# Altium PCB MODULIQ_Hub_ESP32-S3.PcbDoc (part 2 of 2)
Units mm, origin at the board's own origin, x right, y up, seen from the top; angles counter-clockwise.
Board outline 24 x 76.5 mm, 4 copper layers (Top, Layer 1, Layer 2, Bot), stack 1.483 mm thick; 56 components, 63 nets, 265 pads, 248 vias.
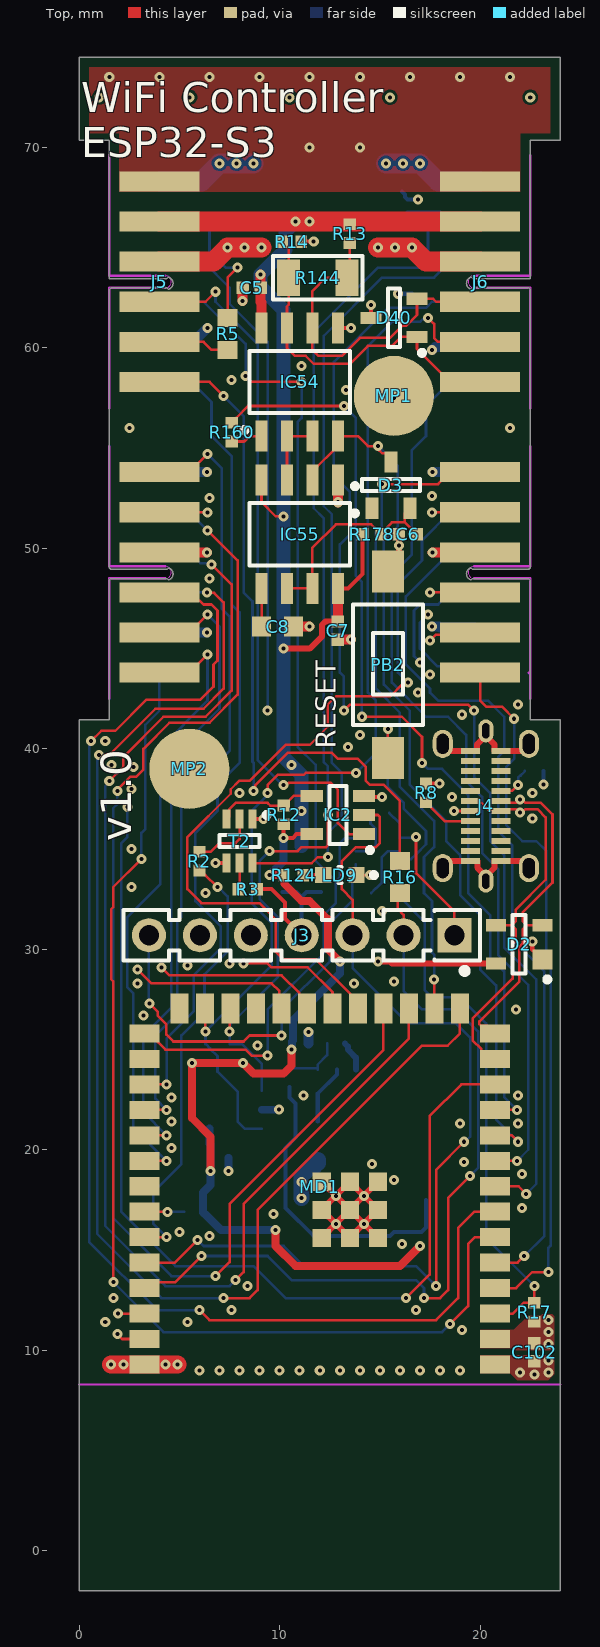
[diagram p0: Top view]

## Via types
v1: diameter 0.5, hole 0.2, Top to Bot, tented both sides, 239 vias
v2: diameter 0.5, hole 0.2, Top to Bot, 9 vias

## Nets (pads, with @x,y where several pads share a name; then routed paths per layer and width w, separated by ;. In a path a pad name is that pad's centre, name@x,y a point inside that pad or via, vN(x,y) a via of type N, cw(c..) or ccw(c..) an arc to the next point about the centre after c; other vN are vias at no path point) (continued)
P3V3: (continued)
  Bot w0.4: IC30.4 6.5,20.3 6.55,20.25 C9.1 v1(6.55,18.95) 6.55,18.25 6.17,17.87 R7.1 6.17,16.88 6.26,16.79 6.28,16.79 7.07,16 v1(9.8,16) ; v1(9.5,33.7) 10.2,34.4 v1(10.2,35.56) ; v1(10.6,25) 10.609,25.009 10.609,25.393 10.677,25.461 10.677,26.477 13,28.8 v1(13,29.4)
  other v1: 23.4,10.3 23.4,10.9 23.4,11.5
P5V0: C2.2 C5.1 C7.1 D1.3 D2.4 IC3.3 IC3.5 IC54.8 IC55.4 IC55.8 J5.2 J6.2 R13.1 R178.1 | length 99.5
  Top w0.127: IC55.4 9.095,52.305 9.8,51.6 v1(10.2,51.6)
  Top w0.2: IC55.8 13.4,48 14.13,48.73 R178.1
  Top w0.3: v1(10.2,45) 11.5,45 12.1,45.6 12.1,46.174 12.276,46.35 C7.1 ; v1(14.9,29.4) 15.5,29.4 15.6,29.3 D2.4
  Top w0.5: v1(9.05,63.65) C5.1 9.05,62.3 9.095,62.255 IC54.8 ; C7.1 12.9,47.995 IC55.8
  Top w1: J5.2 v1(10.8,66.3) v1(11.5,66.3) J6.2
  Layer 2 w0.4: v1(10.6,39.2) 11.1,38.7 v1(11.1,36.9) 11.1,34.905 14.9,31.105 v1(14.9,29.4) 14.9,28.1 11.9,25.1 11.9,19.2 v1(11.1,18.4) v1(11.1,17.6)
  Bot w0.2: IC3.3 11.9,22.8 12.85,23.75 IC3.5
  Bot w0.7: D1.3 v1(11.1,36.9) 11.1,38.7 10.2,39.6 v1(10.2,45) v1(10.2,51.6) 10.2,61.9 9.4,62.7 9.05,63.05 v1(9.05,63.65) 10.3,64.9 10.3,65.8 v1(10.8,66.3) v1(11.5,66.3)
  Bot w0.8: v1(11.1,17.6) v1(11.1,18.4) 11.1,18.7 11.575,19.175 11.725,19.175 11.9,19.35 C2.2
P12V0: J5.1 J5.3 J6.1 J6.3 | length 10.8
  Top w1: J5.3 6.7,64.3 v1(7.4,65) v1(8.25,65) v1(9.1,65) ; v1(14.9,65) v1(15.75,65) v1(16.6,65) 17.3,64.3 J6.3
  other v1: 11.5,70 14,70 1.5,73.5 4,73.5 6.5,73.5 9,73.5 11.5,73.5 14,73.5 16.5,73.5 19,73.5 21.5,73.5
RESETn_O: J6.9 T2.6 | length 39.9
  Top w0.127: T2.6 11.6,34.3 11.9,34.6 v1(12.4,34.6)
  Bot w0.127: v1(12.4,34.6) 12.4,35.8 13.1,36.5 13.1,38.8 12.6,39.3 12.6,51.7 12.2,52.1 12.2,60.6 15.1,63.5 17.7,63.5 18.5,64.3 J6.9
SCL: D22.1 IC30.1 J6.8 MD1.24 R11.1 | length 59.2
  Top w0.127: v1(7.5,25.9) 7.5,26.99 MD1.24 ; v1(9.5,34.9) 10.9,34.9 11.1,35.1 12.312,35.1 12.4,35.188 v1(12.4,36.7)
  Bot w0.127: IC30.1 9.1,24.3 8.13,25.27 R11.1 v1(7.5,25.9) 7.536,25.936 7.536,26.236 9.9,28.6 9.9,31.6 9,32.5 9,34.4 v1(9.5,34.9) ; v1(12.4,36.7) 12.4,39.141 12.194,39.347 12.194,51.506 11.7,52 11.7,60.8 14.9,64 17,64 17.4,64.4 17.4,65.9 16.9,66.4 D22.1 16.1,66.525 16.375,66.8 18,66.8 18.5,66.3 J6.8
SDA: D23.1 IC30.3 J6.5 MD1.25 R15.1 | length 55.7
  Top w0.127: MD1.25 6.29,27.04 6.29,25.91 v1(6.3,25.9) ; v1(9.4,37.8) 9.4,38.2 9.9,38.7 11.2,38.7 11.3,38.8 v1(13.8,38.8) ; v1(17.4,61.5) 17.7,61.2 17.7,60.5 17.9,60.3 J6.5
  Bot w0.127: IC30.3 8.25,21.05 7.9,21.4 7.9,22.9 6.9,23.9 6.9,24.67 6.534,25.036 6.534,25.056 6.32,25.27 R15.1 v1(6.3,25.9) 9.612,29.212 9.612,31.288 8.6,32.3 8.6,36.9 9.4,37.7 v1(9.4,37.8) ; v1(13.8,38.8) 14.8,39.8 14.8,42.4 14.4,42.8 14.4,60.1 15.6,61.3 D23.1 17,61.3 17.129,61.429 17.329,61.429 v1(17.4,61.5)
TRG: J8.7 MD1.16 | length 33
  Top w0.127: v1(15.1,53.2) 17.9,53.2 18.5,53.8 J8.7 ; v1(17.7,28.5) 17.715,28.485 MD1.16
  Bot w0.127: v1(15.1,53.2) 15.1,51.1 14.8,50.8 14.8,43 16,41.8 16,38.1 17.7,36.4 17.7,35.1 17.2,34.6 17.2,32.8 17.6,32.4 17.6,29.834 17.7,29.734 v1(17.7,28.5)
U0RXD: IC2.2 J3.3 MD1.36 | length 46.4
  Top w0.127: MD1.36 4.77,14.37 v1(5.9,15.5) ; J3.3 13.64,32.46 13.1,33 13.1,34.4 13.8,35.1 14.8,35.1 15,35.3 15,36.6 14.9,36.7 IC2.2 ; v1(17.8,13.2) 17.8,19 v1(19.2,20.4)
  Bot w0.127: v1(5.9,15.5) 6.2,15.2 10.2,15.2 11.2,14.2 16.8,14.2 v1(17.8,13.2) ; J3.3 13.64,29.06 16.4,26.3 18.8,26.3 19.5,25.6 19.5,20.65 19.25,20.4 v1(19.2,20.4)
U0TXD: J3.2 MD1.37 R16.2 | length 40.2
  Top w0.127: MD1.37 3.55,13.4 4.8,13.4 v1(6.1,14.7) ; R16.2@15.9,32.8 15.9,32 16.18,31.72 J3.2 ; v1(17.2,12.6) 18,12.6 18.4,13 18.4,17.6 v1(19.5,18.7)
  Bot w0.127: v1(6.1,14.7) 9.4,14.7 10.6,13.5 16.8,13.5 17.2,13.1 v1(17.2,12.6) ; J3.2 16.18,27.92 17.1,27 18.8,27 19.9,25.9 19.9,19.1 v1(19.5,18.7)
U1_CTS: J5.8 R5.1 | length 8.3
  Top w0.127: R5.1 7.4,63.5 v1(7.9,64)
  Bot w0.127: J5.8 6.3,66.3 6.5,66.1 6.5,64.8 7.3,64 v1(7.9,64)
U1_RTS: J5.5 R5.2 | length 3.6
  Top w0.127: J5.5 6.2,60.3 6.6,59.9 R5.2
U1_RXD: IC2.1 J5.4 | length 35.1
  Top w0.127: J5.4 6.3,62.3 v1(6.8,62.8) ; v1(10.2,38.2) 10.271,38.271 10.432,38.271 10.461,38.3 12.559,38.3 12.9,37.959 12.9,36.3 13.45,35.75 IC2.1
  Bot w0.127: v1(6.8,62.8) 6.8,62.3 8.9,60.2 8.9,39.452 10.152,38.2 v1(10.2,38.2)
U1_TXD: J5.6 R16.1 | length 36.4
  Top w0.127: J5.6 6.5,58.3 v1(7.2,57.6) ; v1(8.7,37.9) 8.771,37.971 8.771,38.171 10.4,39.8 12.6,39.8 12.9,39.5 13.9,39.5 14.3,39.1 14.3,38.4 14.5,38.2 15.2,38.2 16,37.4 R16.1
  Bot w0.127: v1(7.2,57.6) 8.2,56.6 8.2,47.803 8.646,47.357 8.646,39.347 8.7,39.293 v1(8.7,37.9)
USB_D_N: D2.3 J4.A7 J4.B7 MD1.13 | length 19.4
  Top w0.127: J4.B7 19.616,37.312 20.057,37.312 20.41,36.958 20.975,36.958 J4.A7 21.115,36.978 21.8,36.978 21.944,36.835 v1(22,36.835) 22.101,36.835 22.244,36.978 22.877,36.978 23.27,36.585 23.27,33.47 21.78,31.98 21.78,31.4 21.58,31.2 ; MD1.13 20.45,24.53 20.064,24.916 20.064,25.017 19.626,25.455 19.626,26.547 21.619,28.541 21.619,30.259 21.78,30.42 21.78,31 21.58,31.2 ; D2.3 21.58,31.2
USB_D_P: D2.2 J4.A6 J4.B6 MD1.14 | length 21.5
  Top w0.127: v1(18.7,36.9) 18.702,36.898 J4.B6 ; MD1.14 20.364,26.186 20.04,26.186 19.965,26.261 19.965,26.407 21.959,28.4 21.959,30.118 22.12,30.28 22.12,31 22.32,31.2 ; J4.A6 21.115,37.318 21.8,37.318 21.944,37.462 v1(22,37.462) 22.101,37.462 22.244,37.318 23.018,37.318 23.61,36.726 23.61,33.329 22.12,31.839 22.12,31.4 22.32,31.2 ; D2.2 22.32,31.2
  Layer 1 w0.127: v1(18.7,36.9) 19.6,37.8 21.68,37.8 v1@22,37.48
VUART_CTS: J3.5
VUART_DTR: J3.1 R4.1 T1.4 | length 8
  Top w0.127: v1(16.8,35.6) 16.8,33.8 18.72,31.88 J3.1
  Bot w0.127: R4.1 15.47,36.78 15.685,36.565 15.705,36.565 16,36.27 T1.4 16.025,35.575 16.775,35.575 v1(16.8,35.6)
VUART_RTS: J3.7 R6.1 T1.1 | length 21.4
  Top w0.127: v1(3.5,27.3) 3.925,26.875 3.925,26.675 4.35,26.25 4.35,25.75 4.7,25.4 8.2,25.4 8.5,25.7 v1(10.1,25.7)
  Bot w0.127: J3.7 3.48,27.32 v1(3.5,27.3) ; v1(10.1,25.7) 10.1,27 12.5,29.4 12.5,31.3 13.63,32.43 R6.1 13.63,33.43 13.8,33.6 T1.1
VUART_Vcc: D1.1 D1.2 J3.4 R3.2 | length 7.7
  Top w0.2: R3.2 9.6,33 10.255,32.345 10.255,31.545 J3.4
  Bot w0.2: D1.2 10.85,32.85 11.1,32.6 ; J3.4 11.1,32.6 ; D1.1 11.35,32.85 11.1,32.6
pads on no net: D3.1 IC30.5 J4.A2 J4.A3 J4.A4 J4.A8 J4.A9 J4.A10 J4.A11 J4.B2 J4.B3 J4.B4 J4.B8 J4.B9 J4.B10 J4.B11 MD1.23 MD1.26 MD1.28 MD1.33

## Polygon pours and split planes (outlines as drawn)
GND on Top "GND_L01_P013" (solid, pour order 13): 21.52,9.76 21.5,9.74 20,9.74 20,8.84 21.5,8.84 21.84,8.5 23.4,8.5 23.7,8.8 23.7,9.6 23.54,9.76
P3V3 on Top "P3V3_L01_P012" (solid, pour order 12): 23.6,10 23.7,10.1 23.7,11.7 23.6,11.8 23.09,11.8 23.01,11.72 22.39,11.72 21.68,11.01 20,11.01 20,10.11 21.59,10.11 21.7,10
P12V0 on Top "P12V0_L01_P009" (solid, pour order 9): 2,67.8 2,70.7 0.5,70.7 0.5,74 23.5,74 23.5,70.7 22,70.7 22,67.8 18,67.8
GND on Layer 1 "GND_L02_P015" (solid, pour order 15): 0.3,8.3 0.3,41.1 1.8,41.1 1.8,70.7 0.3,70.7 0.3,74.2 23.7,74.2 23.7,70.7 22.2,70.7 22.2,41.1 23.7,41.1 23.7,8.3
P3V3 on Bot "P3V3_L04_P005" (solid, pour order 5): 16.725,15.075 19.9,11.9 21.8,10 23.6,10 23.7,10.1 23.7,11.7 23.4,12 22.1,12 18.5,15.6 18.5,22.35 15.5,22.35 15.5,20.8 16.15,20.8 16.725,20.225
GND on Bot "GND_L04_P008" (solid, pour order 8): 14.725,16.775 13.125,18.375 13.125,20.475 13.525,20.875 13.525,21.925 14.675,21.925 14.9,21.7 14.9,20.8 14.925,20.8 15.5,20.225 16.075,20.225 16.075,16.775
NetC1_2 on Bot "NETC1_2_L04_P006" (solid, pour order 6): 18.5,23.65 16.15,23.65 14.75,22.25 13.45,22.25 13.125,21.925 13.125,20.875 12.575,20.875 12.575,22.775 13,23.2 14.2,23.2 14.4,23.4 14.4,24.43 13.84,24.99 13.84,25.61 15.09,25.61 15.5,25.2 18.5,25.2
P5V0 on Bot "P5V0_L04_P007" (solid, pour order 7): 11.625,21.925 11.325,21.625 11.325,18.775 12.475,18.775 12.475,20.575 12.175,20.875 12.175,21.925
P12V0 on Bot "P12V0_L04_P011" (solid, pour order 11): 17,64.9 17,65.6 16.702,65.898 15.702,65.898 15.5,66.1 15.5,68.165 15.055,68.609 15.055,69.595 15.3,69.839 17.239,69.839 18.1,70.7 23.5,70.7 23.5,74 0.5,74 0.5,70.7 6.4,70.7 7.265,69.835 7.265,68.561 6.9,68.196 6.9,64.9 7.1,64.7 9.3,64.7 9.5,64.9 9.5,66.4 9.9,66.8 11.8,66.8 12.2,66.4 12.2,64.9 12.5,64.6 16.7,64.6
GND on Layer 2 "GND_L03_P014" (solid, pour order 14): 0.3,8.3 0.3,41.1 1.8,41.1 1.8,70.7 0.3,70.7 0.3,74.2 23.7,74.2 23.7,70.7 22.2,70.7 22.2,41.1 23.7,41.1 23.7,8.3

## Keep-outs
Top:
  lines w0.1: 0,8.3 24,8.3
KeepOutLayer:
  lines w0.1: 22.414,43.8 22.457,43.757

## Silkscreen, mask and mechanical layers (free items; w line width, h text height)
TopOverlay:
  text "WiFi Controller / ESP32-S3" at 0.1,69.5 h1.5
  text "RESET" at 12.8,40 h1 r90
  text "v1.0" at 2.6,35.4 h1.52 r90
Mechanical1:
  the board outline again, w0.15